# Altium PCB 192ddddd.PcbDoc
Units mm, origin at the board's own origin, x right, y up, seen from the top; angles counter-clockwise.
Board outline 212.45 x 112 mm, 2 copper layers (Top Layer, Bottom Layer); 61 components, 98 nets, 180 pads, 0 vias.
Unrouted connection lines stored in the file: 106.
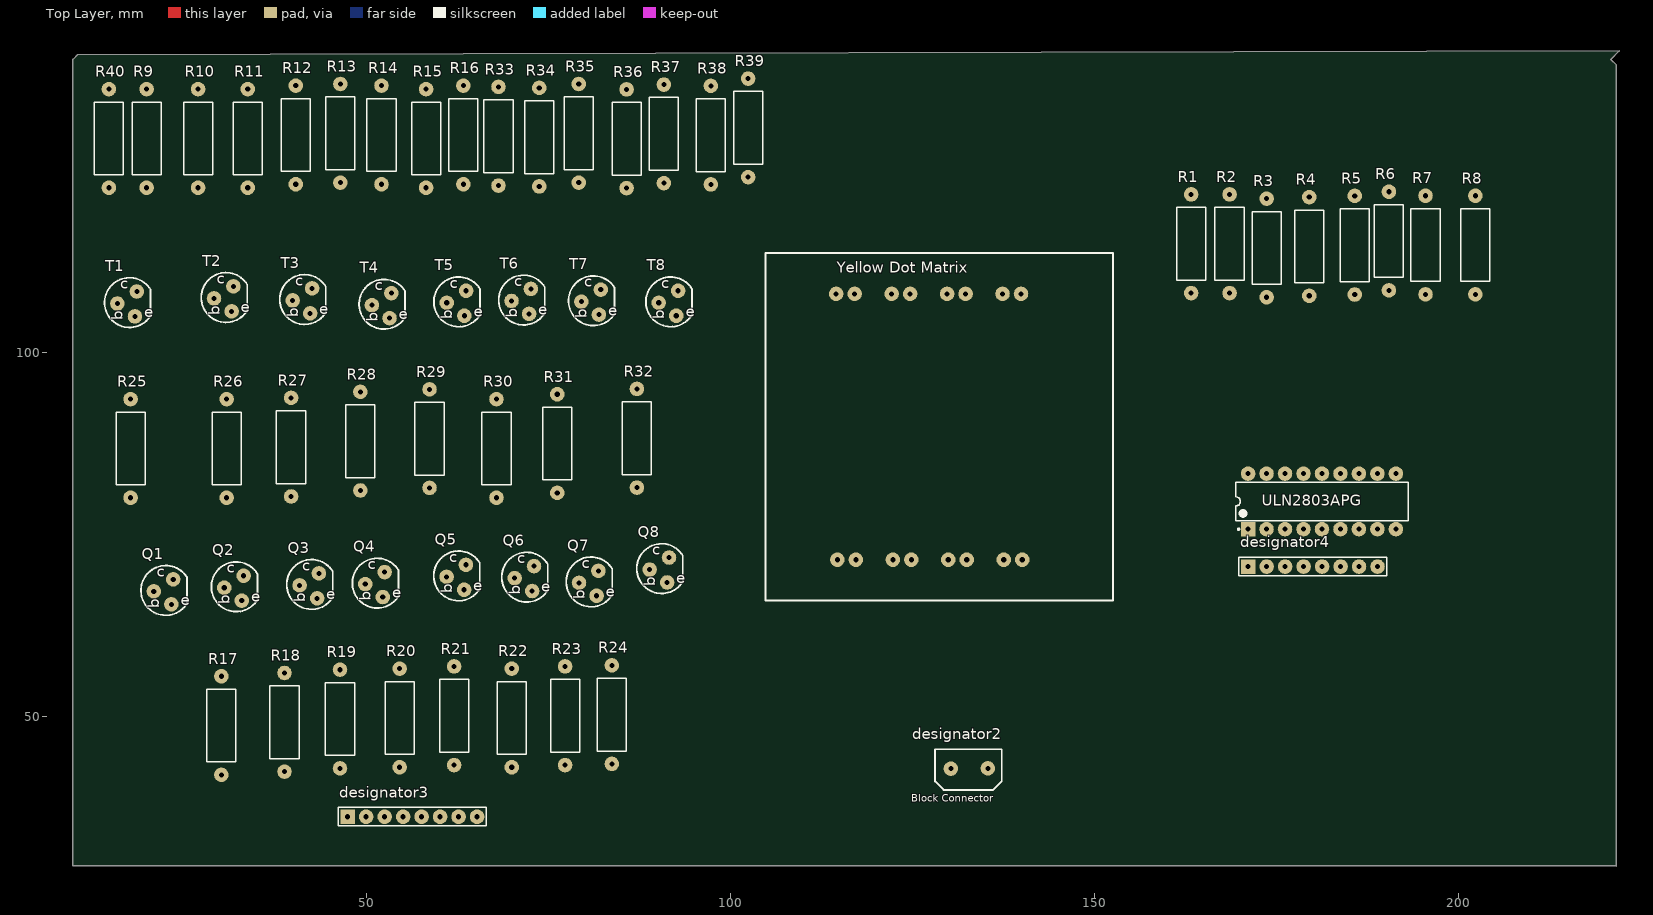
[diagram p0: Top Layer view]
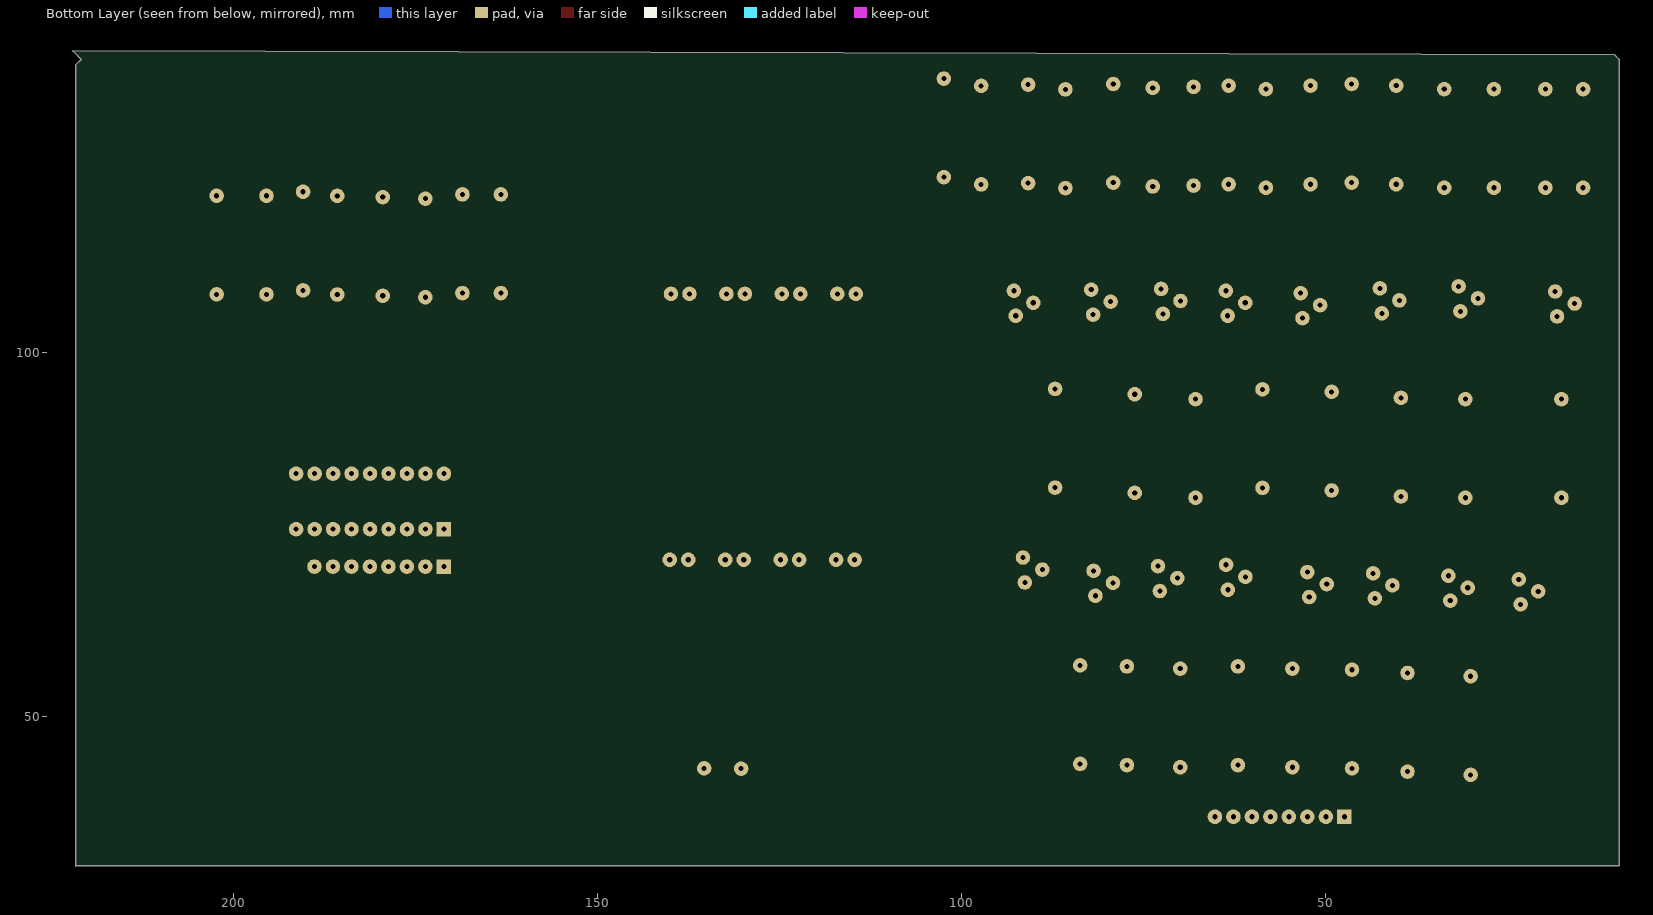
[diagram p1: Bottom Layer view, seen from below]

## Layer stack, top to bottom
Top Layer: signal copper 0.0356
Dielectric: dielectric 0.32, FR-4, Dk 4.8
Bottom Layer: signal copper 0.0356

## Board outline
10.25,140.925 9.6,140.275 9.6,29.475 221.65,29.475 221.675,29.45 221.675,139.5 220.9,140.275 222.05,141.425 222.05,141.45

## Design rules (kind name [scope] priority, off if disabled: settings)
Clearance [All] p1: gap=0.254
PolygonConnect [All] p1: connectstyle=Relief reliefconductorwidth=0.254 reliefentries=4 polygonreliefangle="90 Angle"
RoutingVias [All] p1: holewidth=0.711 width=1.27 viastyle="Through Hole" minholewidth=0.711 minwidth=1.27 maxholewidth=0.711 maxwidth=1.27
SilkscreenOverComponentPads [All] p1: minsilkscreentomaskgap=0.254
SolderMaskExpansion [All] p1: expansion=0.102
Width [All] p1: maxlimit=0.8 minlimit=0.6 preferedwidth=0.7 minimp=50.000000 maximp=50.000000 favimp=50.000000
27 further rules are at their usual default settings.

## Components (designator, comment, footprint, x,y, rotation, side; value= is the part's Value field where it differs from the comment)
designator2 "Comment" "PCB Block Connector" 132.775,42.85 r0 top
designator3 "Comment" HDR1X8 47.35,36.225 r0 top
designator4 "Comment" HDR1X8 171.075,70.6 r0 top
Q1 "Comment" "TO-92 Packaging" 22.05,67.125 r0 top
Q2 "Comment" "TO-92 Packaging" 31.725,67.625 r0 top
Q3 "Comment" "TO-92 Packaging" 42.075,67.95 r0 top
Q4 "Comment" "TO-92 Packaging" 51.1,68.125 r0 top
Q5 "Comment" "TO-92 Packaging" 62.275,69.125 r0 top
Q6 "Comment" "TO-92 Packaging" 71.625,68.95 r0 top
Q7 "Comment" "TO-92 Packaging" 80.475,68.3 r0 top
Q8 "Comment" "TO-92 Packaging" 90.175,70.125 r0 top
R1 "Comment" RES13.55-10X4 163.25,114.95 r90 top
R2 "Comment" RES13.55-10X4 168.525,114.95 r90 top
R3 "Comment" RES13.55-10X4 173.625,114.375 r90 top
R4 "Comment" RES13.55-10X4 179.475,114.575 r90 top
R5 "Comment" RES13.55-10X4 185.725,114.75 r90 top
R6 "Comment" RES13.55-10X4 190.425,115.325 r90 top
R7 "Comment" RES13.55-10X4 195.45,114.775 r90 top
R8 "Comment" RES13.55-10X4 202.3,114.775 r90 top
R9 "Comment" RES13.55-10X4 19.725,129.425 r90 top
R10 "Comment" RES13.55-10X4 26.8,129.425 r90 top
R11 "Comment" RES13.55-10X4 33.625,129.425 r90 top
R12 "Comment" RES13.55-10X4 40.225,129.9 r90 top
R13 "Comment" RES13.55-10X4 46.35,130.125 r90 top
R14 "Comment" RES13.55-10X4 52,129.9 r90 top
R15 "Comment" RES13.55-10X4 58.125,129.425 r90 top
R16 "Comment" RES13.55-10X4 63.25,129.9 r90 top
R17 "Comment" RES13.55-10X4 30,48.75 r90 top
R18 "Comment" RES13.55-10X4 38.675,49.2 r90 top
R19 "Comment" RES13.55-10X4 46.3,49.65 r90 top
R20 "Comment" RES13.55-10X4 54.5,49.8 r90 top
R21 "Comment" RES13.55-10X4 61.975,50.1 r90 top
R22 "Comment" RES13.55-10X4 69.9,49.8 r90 top
R23 "Comment" RES13.55-10X4 77.225,50.1 r90 top
R24 "Comment" RES13.55-10X4 83.65,50.25 r90 top
R25 "Comment" RES13.55-10X4 17.525,86.825 r90 top
R26 "Comment" RES13.55-10X4 30.725,86.825 r90 top
R27 "Comment" RES13.55-10X4 39.575,87 r90 top
R28 "Comment" RES13.55-10X4 49.1,87.825 r90 top
R29 "Comment" RES13.55-10X4 58.6,88.175 r90 top
R30 "Comment" RES13.55-10X4 67.8,86.825 r90 top
R31 "Comment" RES13.55-10X4 76.15,87.5 r90 top
R32 "Comment" RES13.55-10X4 87.1,88.225 r90 top
R33 "Comment" RES13.55-10X4 68.075,129.725 r90 top
R34 "Comment" RES13.55-10X4 73.675,129.6 r90 top
R35 "Comment" RES13.55-10X4 79.1,130.125 r90 top
R36 "Comment" RES13.55-10X4 85.675,129.375 r90 top
R37 "Comment" RES13.55-10X4 90.8,130.05 r90 top
R38 "Comment" RES13.55-10X4 97.25,129.875 r90 top
R39 "Comment" RES13.55-10X4 102.375,130.875 r90 top
R40 "Comment" RES13.55-10X4 14.55,129.425 r90 top
T1 "Comment" "TO-92 Packaging" 17.05,106.675 r0 top
T2 "Comment" "TO-92 Packaging" 30.325,107.375 r0 top
T3 "Comment" "TO-92 Packaging" 41.125,107.1 r0 top
T4 "Comment" "TO-92 Packaging" 52.025,106.45 r0 top
T5 "Comment" "TO-92 Packaging" 62.3,106.775 r0 top
T6 "Comment" "TO-92 Packaging" 71.2,107.025 r0 top
T7 "Comment" "TO-92 Packaging" 80.8,106.925 r0 top
T8 "Comment" "TO-92 Packaging" 91.425,106.775 r0 top
ULN2803APG "Comment" DIP-18 181.225,79.55 r90 top
"Yellow Dot Matrix" "Comment" "Yellow or Green Dot Matrix DIsplay" 128.525,89.8 r0 top

## Footprints (in the part's own frame and the unit in brackets; to place one, negate y for a bottom-side part, rotate by r counter-clockwise, add the part's x,y. Pads: shape width x height; smd on the part's side, far side on the other; paste and mask are expansions set on the pad)
DIP-18 [mm] "DIP, 18-Pin, Row Spacing 7.62 mm, Pitch 2.54 mm"
  rect 2x2 hole 0.7: 1(-3.81,10.16)
  round 2 hole 0.7: 2(-3.81,7.62) 3(-3.81,5.08) 4(-3.81,2.54) 5(-3.81,0) 6(-3.81,-2.54) 7(-3.81,-5.08) 8(-3.81,-7.62) 9(-3.81,-10.16) 10(3.81,-10.16) 11(3.81,-7.62) 12(3.81,-5.08) 13(3.81,-2.54) 14(3.81,0) 15(3.81,2.54) 16(3.81,5.08) 17(3.81,7.62) 18(3.81,10.16)
  silkscreen extent -3.93,-11.85 2.65,11.85, body extent -3.6,-11.8 3.6,11.8, height 5.33
HDR1X8 [mm]
  rect 2x2 hole 0.7: 1(0,0)
  round 2 hole 0.7: 2(2.54,0) 3(5.08,0) 4(7.62,0) 5(10.16,0) 6(12.7,0) 7(15.24,0) 8(17.78,0)
  silkscreen extent -1.27,-1.27 19.05,1.27
"PCB Block Connector" [mm]
  round 2 hole 0.7: 1(-2.547,-0.023) 2(2.547,0.023)
  silkscreen extent -4.7,-2.94 4.45,2.65
RES13.55-10X4 [mm] "Resistor, Axial; Body 10 x 4 mm (LxDia. max), Lead Dia. 0.65 mm (max)"
  round 2 hole 0.7: 1(-6.775,0) 2(6.775,0)
  silkscreen extent -5,-2 5,2
"TO-92 Packaging" [mm] "for 2N3904"
  round 2 hole 0.7: T(-1.334,0.063) T(1.079,-1.715) T(1.333,1.714)
  silkscreen extent -3.1,-3.23 3.22,3.61
"Yellow or Green Dot Matrix DIsplay" [mm] "Y or G Dot Matrix"
  round 2 hole 0.7: 3(-13.886,-18.262) 4(-11.346,-18.262) 6(-6.266,-18.262) 7(-3.726,-18.262) 9(1.354,-18.262) 10(3.894,-18.262) 12(8.974,-18.262) 13(11.514,-18.262) 20(11.347,18.262) 21(8.807,18.262) 23(3.727,18.262) 24(1.187,18.262) 26(-3.893,18.262) 27(-6.433,18.262) 29(-11.513,18.262) 30(-14.053,18.262)
  silkscreen extent -23.78,-23.9 23.99,23.89

## Nets (pads, with @x,y where several pads share a name; then routed paths per layer and width w, separated by ;. In a path a pad name is that pad's centre, name@x,y a point inside that pad or via, vN(x,y) a via of type N, cw(c..) or ccw(c..) an arc to the next point about the centre after c; other vN are vias at no path point)
1B: designator4.1 ULN2803APG.1
1C: R1.1 ULN2803APG.18
1D: "Yellow Dot Matrix.3" R7.2
1U: 
2B: designator4.2 ULN2803APG.2
2C: R2.1 ULN2803APG.17
2D: "Yellow Dot Matrix.4" T2.T@31.659,109.089
2U: 
3B: designator4.3 ULN2803APG.3
3C: R3.1 ULN2803APG.16
3D: "Yellow Dot Matrix.6" R5.2
3U: 
4B: designator4.4 ULN2803APG.4
4C: R4.1 ULN2803APG.15
4D: "Yellow Dot Matrix.7" T4.T@53.358,108.164
4U: 
5B: designator4.5 ULN2803APG.5
5C: R5.1 ULN2803APG.14
5D: "Yellow Dot Matrix.9" R3.2
5U: 
6B: designator4.6 ULN2803APG.6
6C: R6.1 ULN2803APG.13
6D: "Yellow Dot Matrix.10" T6.T@72.534,108.739
6U: 
7B: designator4.7 ULN2803APG.7
7C: R7.1 ULN2803APG.12
7D: "Yellow Dot Matrix.12" R1.2
7U: 
8B: designator4.8 ULN2803APG.8
8C: R8.1 ULN2803APG.11
8D: "Yellow Dot Matrix.13" T8.T@92.759,108.489
8U: 
9D: "Yellow Dot Matrix.20" R2.2
10D: "Yellow Dot Matrix.21" T7.T@82.133,108.64
11D: "Yellow Dot Matrix.23" R4.2
12D: "Yellow Dot Matrix.24" T5.T@63.634,108.489
13D: "Yellow Dot Matrix.26" R6.2
14D: "Yellow Dot Matrix.27" T3.T@42.458,108.815
15D: "Yellow Dot Matrix.29" R8.2
16D: "Yellow Dot Matrix.30" T1.T@18.384,108.39
b1: R25.2 R40.1 T1.T@15.717,106.739
b2: R10.1 R26.2 T2.T@28.992,107.438
b3: R12.1 R27.2 T3.T@39.791,107.164
b4: R14.1 R28.2 T4.T@50.691,106.513
b5: R16.1 R29.2 T5.T@60.967,106.838
b6: R30.2 R34.1 T6.T@69.867,107.088
b7: R31.2 R36.1 T7.T@79.466,106.989
b8: R32.2 R38.1 T8.T@90.092,106.838
b9: Q1.T@20.716,67.188 R17.2
b10: Q2.T@30.392,67.689 R18.2
b11: Q3.T@40.741,68.013 R19.2
b12: Q4.T@49.767,68.188 R20.2
b13: Q5.T@60.942,69.188 R21.2
b14: Q6.T@70.292,69.013 R22.2
b15: Q7.T@79.142,68.363 R23.2
b16: Q8.T@88.841,70.188 R24.2
c1: 
c2: 
c3: 
c4: 
c5: 
c6: 
c7: 
c8: 
c9: Q1.T@23.383,68.839 R25.1
c10: Q2.T@33.059,69.34 R26.1
c11: Q3.T@43.408,69.664 R27.1
c12: Q4.T@52.434,69.839 R28.1
c13: Q5.T@63.609,70.839 R29.1
c14: Q6.T@72.959,70.664 R30.1
c15: Q7.T@81.809,70.014 R31.1
c16: Q8.T@91.508,71.839 R32.1
e1: R9.1 T1.T@18.13,104.961
e2: R11.1 T2.T@31.405,105.66
e3: R13.1 T3.T@42.204,105.386
e4: R15.1 T4.T@53.104,104.735
e5: R33.1 T5.T@63.38,105.06
e6: R35.1 T6.T@72.28,105.31
e7: R37.1 T7.T@81.879,105.211
e8: R39.1 T8.T@92.505,105.06
e9: 
e10: 
e11: 
e12: 
e13: 
e14: 
e15: 
e16: 
GND: designator2.1 Q1.T@23.129,65.41 Q2.T@32.805,65.911 Q3.T@43.154,66.235 Q4.T@52.18,66.41 Q5.T@63.355,67.41 Q6.T@72.705,67.235 Q7.T@81.555,66.585 Q8.T@91.254,68.41 ULN2803APG.9
VCC: designator2.2 R9.2 R10.2 R11.2 R12.2 R13.2 R14.2 R15.2 R16.2 R33.2 R34.2 R35.2 R36.2 R37.2 R38.2 R39.2 R40.2 ULN2803APG.10
z1: designator3.1 R17.1
z2: designator3.2 R18.1
z3: designator3.3 R19.1
z4: designator3.4 R20.1
z5: designator3.5 R21.1
z6: designator3.6 R22.1
z7: designator3.7 R23.1
z8: designator3.8 R24.1

## Text inside footprints (layer, text, board x,y; h text height)
designator2: Top Overlay "Block Connector" at 124.774,38.278 h1.02
Q1: Top Overlay "c" at 21.097,69.22 h1.5; Top Overlay "e" at 24.399,65.283 h1.5; Top Overlay "b" at 21.478,64.902 h1.52 r90
Q2: Top Overlay "c" at 30.772,69.721 h1.5; Top Overlay "e" at 34.074,65.784 h1.5; Top Overlay "b" at 31.153,65.403 h1.52 r90
Q3: Top Overlay "c" at 41.123,70.046 h1.5; Top Overlay "e" at 44.425,66.109 h1.5; Top Overlay "b" at 41.504,65.728 h1.52 r90
Q4: Top Overlay "c" at 50.147,70.22 h1.5; Top Overlay "e" at 53.449,66.283 h1.5; Top Overlay "b" at 50.528,65.902 h1.52 r90
Q5: Top Overlay "c" at 61.323,71.221 h1.5; Top Overlay "e" at 64.625,67.284 h1.5; Top Overlay "b" at 61.704,66.903 h1.52 r90
Q6: Top Overlay "c" at 70.673,71.045 h1.5; Top Overlay "e" at 73.975,67.108 h1.5; Top Overlay "b" at 71.054,66.727 h1.52 r90
Q7: Top Overlay "c" at 79.523,70.396 h1.5; Top Overlay "e" at 82.825,66.459 h1.5; Top Overlay "b" at 79.904,66.078 h1.52 r90
Q8: Top Overlay "c" at 89.223,72.221 h1.5; Top Overlay "e" at 92.525,68.284 h1.5; Top Overlay "b" at 89.604,67.903 h1.52 r90
T1: Top Overlay "c" at 16.097,108.77 h1.5; Top Overlay "e" at 19.399,104.833 h1.5; Top Overlay "b" at 16.478,104.452 h1.52 r90
T2: Top Overlay "c" at 29.372,109.47 h1.5; Top Overlay "e" at 32.674,105.533 h1.5; Top Overlay "b" at 29.753,105.152 h1.52 r90
T3: Top Overlay "c" at 40.173,109.195 h1.5; Top Overlay "e" at 43.475,105.258 h1.5; Top Overlay "b" at 40.554,104.877 h1.52 r90
T4: Top Overlay "c" at 51.073,108.546 h1.5; Top Overlay "e" at 54.375,104.609 h1.5; Top Overlay "b" at 51.454,104.228 h1.52 r90
T5: Top Overlay "c" at 61.347,108.871 h1.5; Top Overlay "e" at 64.649,104.934 h1.5; Top Overlay "b" at 61.728,104.553 h1.52 r90
T6: Top Overlay "c" at 70.247,109.121 h1.5; Top Overlay "e" at 73.549,105.184 h1.5; Top Overlay "b" at 70.628,104.803 h1.52 r90
T7: Top Overlay "c" at 79.848,109.021 h1.5; Top Overlay "e" at 83.15,105.084 h1.5; Top Overlay "b" at 80.229,104.703 h1.52 r90
T8: Top Overlay "c" at 90.472,108.871 h1.5; Top Overlay "e" at 93.774,104.934 h1.5; Top Overlay "b" at 90.853,104.553 h1.52 r90